# Altium PCB 400250.PcbDoc (part 1 of 2)
Units mm, origin at the board's own origin, x right, y up, seen from the top; angles counter-clockwise.
Board outline 46.04 x 15.24 mm, 2 copper layers (Top Layer, Bottom Layer), stack 1.97 mm thick; 97 components, 64 nets, 288 pads, 105 vias.
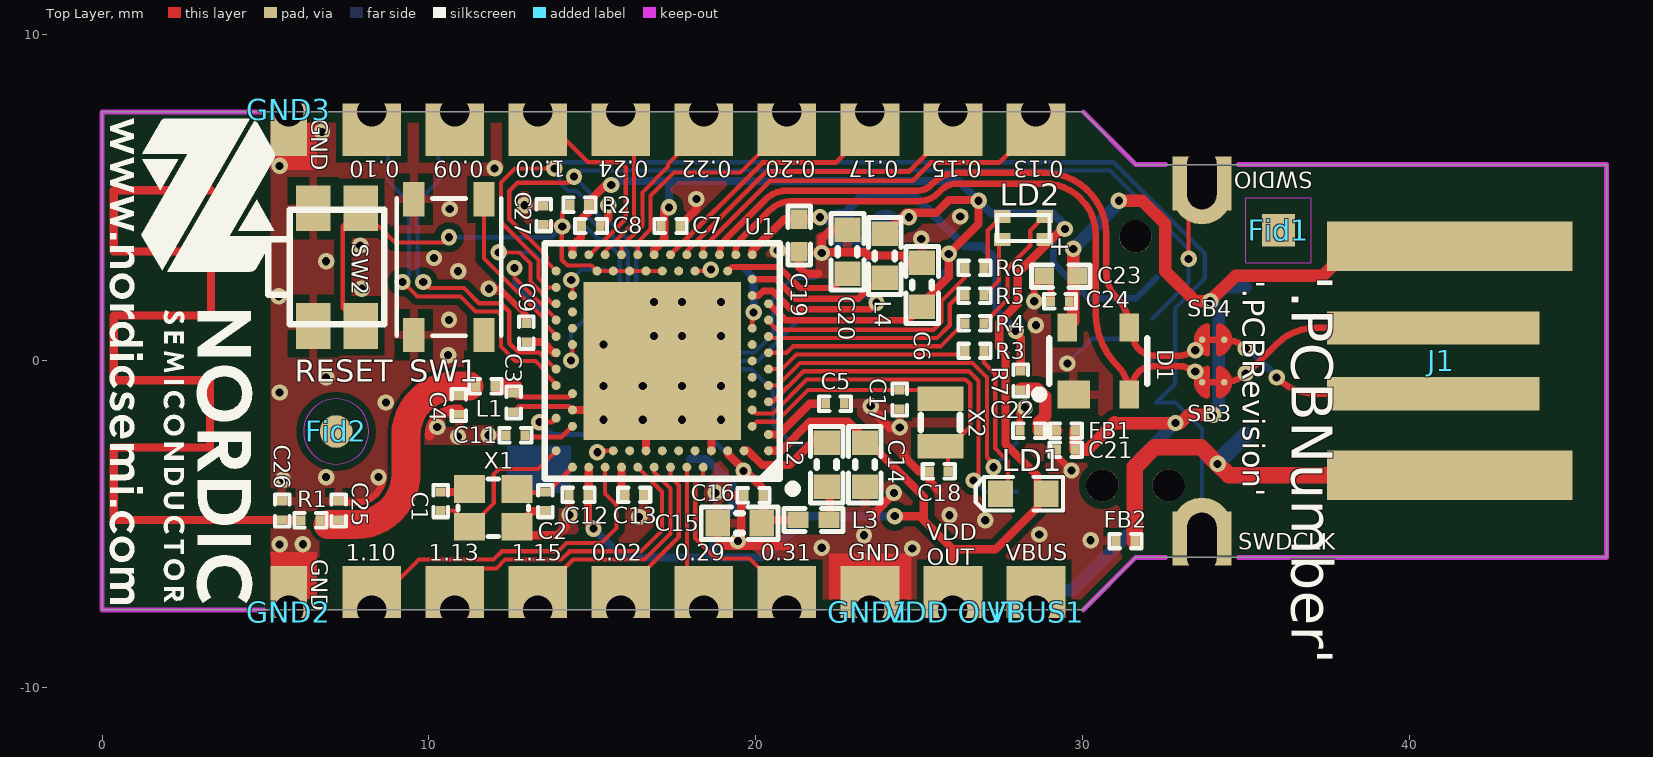
[diagram p0: Top Layer view]
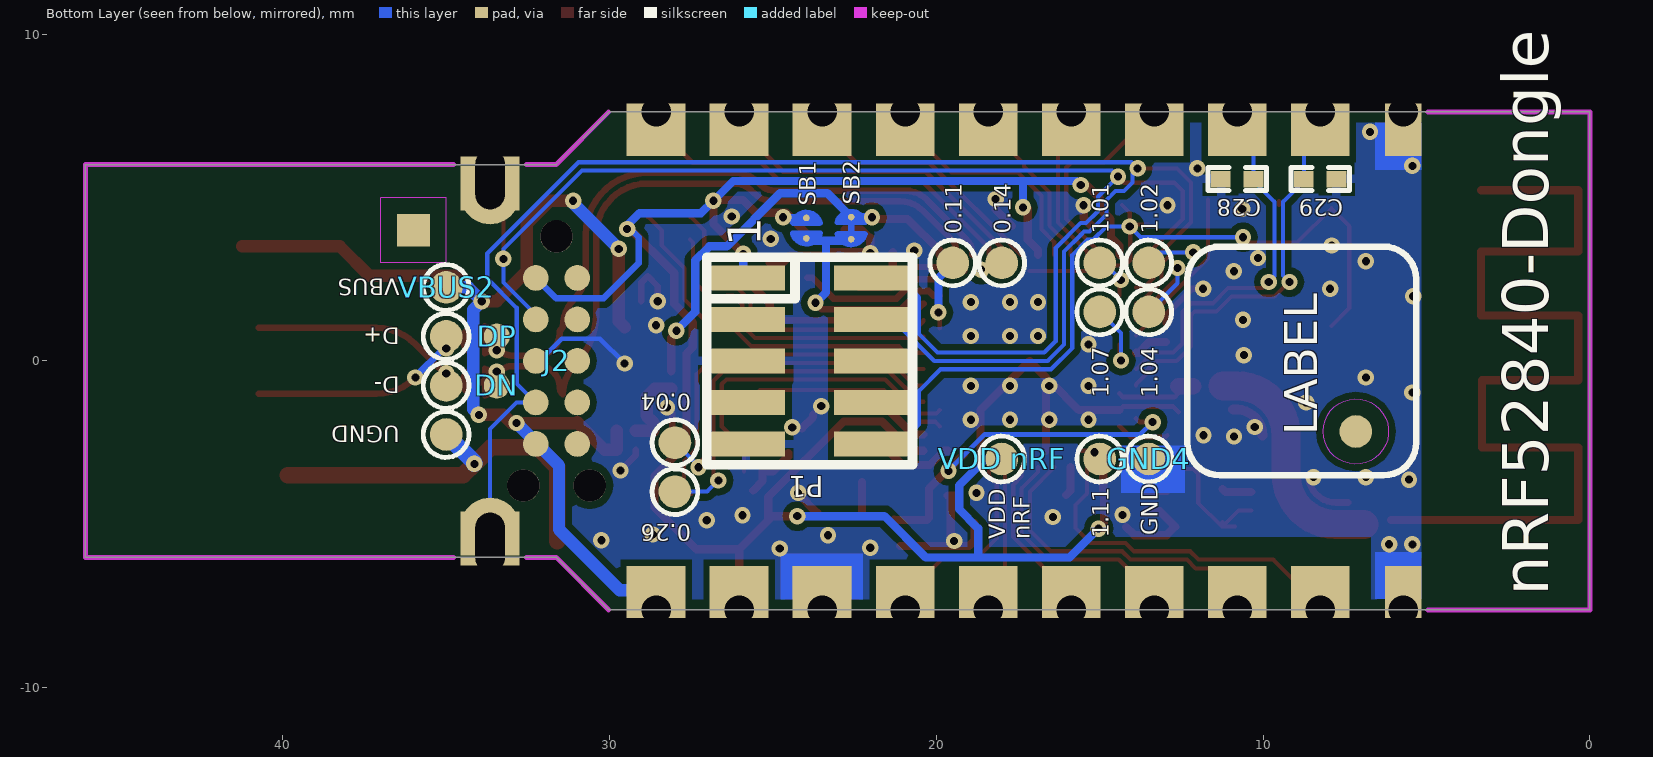
[diagram p1: Bottom Layer view, seen from below]

## Layer stack, top to bottom
Top Solder: solder mask 0.05, Solder Resist Halogen-Free, Dk 3.5
Top Layer: signal copper 0.035
Dielectric1: core 1.9, FR-4 Halogen-Free, Dk 4.8
Bottom Layer: signal copper 0.035
Bottom Solder: solder mask 0.05, Solder Resist Halogen-Free, Dk 3.5

## Board outline
0,-7.62 0,7.62 30.027,7.62 31.637,6.01 46.039,6.01 46.039,-6.01 31.637,-6.01 30.027,-7.62

## Design rules (kind name [scope] priority, off if disabled: settings)
Clearance ANT_Clerance [InNet('ANT') or InNet('RF')] p1: gap=0.127 ignorepadtopadclearanceinfootprint=FALSE except(0: Arc-Hole Track-Hole SMDPad-Hole THPad-Hole Via-Hole Fill-Hole Poly-Hole Region-Hole Text-Hole)
Clearance NPTH [Not PadIsPlated And HoleSize > 0] p2: gap=0.229 ignorepadtopadclearanceinfootprint=FALSE except(0: Arc-Hole Track-Hole SMDPad-Hole THPad-Hole Via-Hole Fill-Hole Poly-Hole Region-Hole Text-Hole)
Clearance Polygon_Clearance [(InNamedPolygon('Top_Layer-GND')) or (InNamedPolygon('Bottom_Layer-GND')) or (InNamedPolygon('Mid_Layer_1-GND')) or (InNamedPolygon('Mid_Layer_2-GND'))] p3: gap=0.203 ignorepadtopadclearanceinfootprint=FALSE
Clearance SB_Clearance [HasFootprint('Solderbridge')] p4: gap=0.127 ignorepadtopadclearanceinfootprint=FALSE except(0: Arc-Hole Track-Hole SMDPad-Hole THPad-Hole Via-Hole Fill-Hole Poly-Hole Region-Hole Text-Hole)
Clearance [All] p5: gap=0.127 ignorepadtopadclearanceinfootprint=FALSE
ComponentClearance [All] p1 off: gap=0.254 collisioncheckmode=3 verticalgap=0.254 showdistances=FALSE
DiffPairsRouting [All] p1: maxlimit=0.127 minlimit=0.127 mostfreqgap=0.127 toplayer_minwidth=0.2 toplayer_maxwidth=0.2 toplayer_prefwidth=0.2 bottomlayer_minwidth=0.2 bottomlayer_maxwidth=0.2 bottomlayer_prefwidth=0.2 maxuncoupledlength=12.7
FabricationTestPointUsage TestPointUsage [All] p1: valid=0 allowmultiple=FALSE
FabricationTestpoint Testpoint [All] p1: side=3 testpointundercomponent=TRUE minsize=1.016 maxsize=2.54 preferedsize=1.524 minholesize=0 maxholesize=1.016 preferedholesize=0.813 testpointgrid=0.025 allowsidetop=TRUE allowsidebottom=TRUE usegrid=TRUE gridtolerance=0
Height [All] p1 off: minheight=0 maxheight=25.4 prefheight=12.7
HoleSize [All] p1: absolutevalues=TRUE maxlimit=2.54 minlimit=0.1 maxpercent=80.000 minpercent=20.000
MinimumAnnularRing [All] p1 off: minimumring=0.152
PolygonConnect PolygonConnect_1 [isVia and innet(gnd)] p1: connectstyle=Direct reliefconductorwidth=0.254 reliefentries=4 polygonreliefangle="90 Angle" airgapwidth=0.254
PolygonConnect [All] p2: connectstyle=Relief reliefconductorwidth=0.254 reliefentries=4 polygonreliefangle="90 Angle" airgapwidth=0.254
RoutingVias [All] p1: holewidth=0.25 width=0.5 viastyle="Through Hole" minholewidth=0.1 minwidth=0.3 maxholewidth=0.305 maxwidth=0.61
SilkToSolderMaskClearance SilkscreenOverComponentPads [IsPad] p1: minsilkscreentomaskgap=0.254 clearancetoexposedcopper=TRUE
SolderMaskExpansion [All] p1: expansion=0.076 istentingtop=FALSE
Width [All] p1: maxlimit=2.54 minlimit=0.127 preferedwidth=0.152 minimp=50.000000 maximp=50.000000 favimp=50.000000
23 further rules are at their usual default settings.

## Classes and differential pairs
differential pair D: +D_P -D_N

## Components (designator, comment, footprint, x,y, rotation, side; value= is the part's Value field where it differs from the comment)
0.02 "CH" Castellated_Hole_0.9mm 15.875,-7.62 r0 top locked
0.04 "Ø1.0mm,SMD" TP_SMD_D1.0mm#1 28,-2.5 r180 bottom locked
0.09 "CH" Castellated_Hole_0.9mm 10.795,7.62 r180 top locked
0.10 "CH" Castellated_Hole_0.9mm 8.255,7.62 r180 top locked
0.11 "Ø1.0mm,SMD" TP_SMD_D1.0mm#1 19.5,3 r180 bottom locked
0.13 "CH" Castellated_Hole_0.9mm 28.575,7.62 r180 top locked
0.14 "Ø1.0mm,SMD" TP_SMD_D1.0mm#1 18,3 r180 bottom locked
0.15 "CH" Castellated_Hole_0.9mm 26.035,7.62 r180 top locked
0.17 "CH" Castellated_Hole_0.9mm 23.495,7.62 r180 top locked
0.20 "CH" Castellated_Hole_0.9mm 20.955,7.62 r180 top locked
0.22 "CH" Castellated_Hole_0.9mm 18.415,7.62 r180 top locked
0.24 "CH" Castellated_Hole_0.9mm 15.875,7.62 r180 top locked
0.26 "Ø1.0mm,SMD" TP_SMD_D1.0mm#1 28,-4 r180 bottom locked
0.29 "CH" Castellated_Hole_0.9mm 18.415,-7.62 r0 top locked
0.31 "CH" Castellated_Hole_0.9mm 20.955,-7.62 r0 top locked
1.00 "CH" Castellated_Hole_0.9mm 13.335,7.62 r180 top locked
1.01 "Ø1.0mm,SMD" TP_SMD_D1.0mm#1 15,3 r180 bottom locked
1.02 "Ø1.0mm,SMD" TP_SMD_D1.0mm#1 13.5,3 r180 bottom locked
1.04 "Ø1.0mm,SMD" TP_SMD_D1.0mm#1 13.5,1.5 r180 bottom locked
1.07 "Ø1.0mm,SMD" TP_SMD_D1.0mm#1 15,1.5 r180 bottom locked
1.10 "CH" Castellated_Hole_0.9mm 8.255,-7.62 r0 top locked
1.11 "Ø1.0mm,SMD" TP_SMD_D1.0mm#1 15,-3 r180 bottom locked
1.13 "CH" Castellated_Hole_0.9mm 10.795,-7.62 r0 top locked
1.15 "CH" Castellated_Hole_0.9mm 13.335,-7.62 r0 top locked
C1 "12pF" CAPC0603X03L_C 10.367,-4.293 r90 top
C2 "12pF" CAPC0603X03L_C 13.568,-4.293 r270 top
C3 "0.8pF" CAPC0603X03L_C 12.593,-1.275 r90 top locked
C4 "0.5pF" CAPC0603X03L_C 10.922,-1.346 r90 top locked
C5 "100nF" CAPC0603X03L_C 22.428,-1.306 r0 top locked
C6 "4.7µF" CAPC1608X06L 25.095,2.326 r90 top locked
C7 "100nF" CAPC0603X03L_C 17.399,4.129 r0 top locked
C8 "100nF" CAPC0603X03L_C 14.961,4.129 r0 top locked
C9 "820pF" CAPC0603X03L_C 12.979,0.864 r90 top locked
C11 "100pF" CAPC0603X03L_C 12.65,-2.275 r180 top
C12 "100nF" CAPC0603X03L_C 14.584,-4.101 r180 top locked
C13 "N.C." CAPC0603X03L_C_NC 16.285,-4.101 r0 top locked
C14 "1.0µF" CAPC1608X06L 23.343,-3.175 r270 top locked
C15 "1.0µF" CAPC1608X06L 19.511,-4.965 r0 top locked
C16 "47nF" CAPC0603X03L_C 19.939,-4.115 r180 top locked
C17 "12pF" CAPC0603X03L_C 24.409,-1.179 r270 top locked
C18 "12pF" CAPC0603X03L_C 25.603,-3.378 r180 top locked
C19 "4.7µF" CAPC1005X04L 21.336,3.835 r270 top locked
C20 "4.7µF" CAPC1608X06L 22.809,3.342 r90 top locked
C21 "10nF" CAPC0603X03L_C 29.489,-2.718 r0 top locked
C22 "100nF" CAPC0603X03L_C 28.372,-2.134 r0 top locked
C23 "4.7µF" CAPC1005X04L 29.337,2.591 r0 top locked
C24 "100nF" CAPC0603X03L_C 29.312,1.829 r0 top locked
C25 "N.C." CAPC0603X03L_C_NC 7.239,-4.572 r90 top locked
C26 "1.5pF" CAPC0603X03L_C 5.512,-4.572 r270 top locked
C27 "100nF" CAPC0603X03L_C 13.513,4.458 r270 top locked
C28 "N.C." CAPC1005X04L_NC 10.795,5.563 r180 bottom locked
C29 "N.C." CAPC1005X04L_NC 8.255,5.563 r180 bottom locked
D1 "PRTR5V0U2X" SOT190P230X110-4L 30.48,0 r90 top locked
D+ "Ø1.0mm,SMD" TP_SMD_D1.0mm#1 35,0.75 r180 bottom locked
D- "Ø1.0mm,SMD" TP_SMD_D1.0mm#1 35,-0.75 r180 bottom locked
DN "Ø1.0mm,SMD" TP_SMD_D1.0mm#2 33.45,-0.75 r270 bottom locked
DP "Ø1.0mm,SMD" TP_SMD_D1.0mm#2 33.45,0.75 r270 bottom locked
FB1 "120R/0.85A" INDC0603X03L_C 29.489,-2.134 r180 top locked
FB2 "120R/0.85A" INDC0603X03L_C 31.318,-5.512 r180 top locked
Fid1 "Fiducial mark" Fiducial_Square 36,4 r0 top locked value=N.A.
Fid2 "Fiducial mark" Fiducial 7.163,-2.159 r0 top locked value=N.A.
GND1 "GND" Castellated_Hole_0.9mm 23.495,-7.62 r0 top locked
GND2 "GND" Castellated_Hole_0.9mm_S 5.715,-7.62 r0 top locked
GND3 "GND" Castellated_Hole_0.9mm_S 5.715,7.62 r180 top locked
GND4 "GND" TP_SMD_D1.0mm#1 13.5,-3 r180 bottom locked
J1 "USB-A" USB-A-PCB 41.039,0.01 r180 top locked
J2 "TC2050-IDC" TC2050-IDC-NLFP 31.623,0 r270 bottom locked
L1 "4.7nH" INDC0603X03L_C 11.739,-0.771 r180 top locked
L2 "10µH" INDC1608X06L 22.174,-3.175 r90 top locked
L3 "15nH" INDC1005X04L 21.768,-4.862 r0 top locked
L4 "10µH" INDC1608X06L 23.952,3.215 r270 top locked
LD1 "L0603G" LED_0603_G 28.194,-4.064 r0 top locked
LD2 "LED RGB" LED_RGB_0603 28.194,4.064 r90 top locked
P1 "Pin Header 2x5, 1.27mm" HDR_2x5-SMD-1.27mm-NC 23.876,0 r270 bottom locked
R1 "0R" RESC0603X03L_C 6.375,-4.877 r180 top locked
R2 "10k" RESC0603X03L_C 14.605,4.775 r0 top locked
R3 "220R" RESC0603X03L_C 26.695,0.305 r0 top locked
R4 "1k2" RESC0603X03L_C 26.695,1.151 r0 top locked
R5 "2k2" RESC0603X03L_C 26.695,1.998 r0 top locked
R6 "390R" RESC0603X03L_C 26.695,2.845 r0 top locked
R7 "4R7" RESC0603X03L_C 28.114,-0.6 r270 top
SB1 "Solderbridge" Solderbridge 23.978,4.064 r270 bottom locked
SB2 "Solderbridge" Solderbridge_Shorted 22.606,4.064 r90 bottom locked net-tie
SB3 "Solderbridge" Solderbridge_Shorted 34,-0.65 r0 top locked net-tie
SB4 "Solderbridge" Solderbridge_Shorted 34,0.65 r0 top locked net-tie
SW1 "PB SW" C&K_PTS810 10.617,2.87 r270 top locked
SW2 "PTS840 GK SMTR LFS" EVQP7A_J_B_K 7.188,2.87 r270 top locked
SWDCLK "CH" Castellated_Hole_0.9mm_D 33.655,-5.56 r0 top locked
SWDIO "CH" Castellated_Hole_0.9mm_D 33.655,5.56 r180 top locked
U1 "nRF52840-QIAA" AQFN50P700X700X85_HS-74N 17.145,0 r180 top locked
UGND "Ø1.0mm,SMD" TP_SMD_D1.0mm#1 35,-2.25 r180 bottom locked
VBUS1 "VBUS" Castellated_Hole_0.9mm 28.575,-7.62 r0 top locked
VBUS2 "VBUS" TP_SMD_D1.0mm#1 35,2.25 r180 bottom locked
"VDD nRF" "Ø1.0mm,SMD" TP_SMD_D1.0mm#1 18,-3 r180 bottom locked
"VDD OUT" "CH" Castellated_Hole_0.9mm 26.035,-7.62 r0 top locked
X1 "32MHz" BT-XTAL_2016 11.967,-4.496 r0 top
X2 "32.768kHz" XTAL_2012 25.654,-1.88 r270 top locked

## Footprints (in the part's own frame and the unit in brackets; to place one, negate y for a bottom-side part, rotate by r counter-clockwise, add the part's x,y. Pads: shape width x height; smd on the part's side, far side on the other; paste and mask are expansions set on the pad)
AQFN50P700X700X85_HS-74N [mm] "AQFN, 73-Leads, Body 7.00x7.00mm, Pitch 0.50mm, Thermal Pad 4.95x4.95mm, IPC Medium Density"
  rect 4.83x4.83 smd mask+0.05: 74(0,0)
  round 0.275 smd paste+0.012 mask+0.05: A8(-1.25,3.25) A10(-0.75,3.25) A12(-0.25,3.25) A14(0.25,3.25) A16(0.75,3.25) A18(1.25,3.25) A20(1.75,3.25) A22(2.25,3.25) A23(2.75,3.25) AA24(3.25,-2.25) AB2(-2.75,-2.5) AC5(-2,-2.75) AC9(-1,-2.75) AC11(-0.5,-2.75) AC13(0,-2.75) AC15(0.5,-2.75) AC17(1,-2.75) AC19(1.5,-2.75) AC21(2,-2.75) AC24(3.25,-2.75) AD2(-2.75,-3.25) AD4(-2.25,-3.25) AD6(-1.75,-3.25) AD8(-1.25,-3.25) AD10(-0.75,-3.25) AD12(-0.25,-3.25) AD14(0.25,-3.25) AD16(0.75,-3.25) AD18(1.25,-3.25) AD20(1.75,-3.25) AD22(2.25,-3.25) AD23(2.75,-3.25) B1(-3.25,2.75) B3(-2.5,2.75) B5(-2,2.75) B7(-1.5,2.75) B9(-1,2.75) B11(-0.5,2.75) B13(0,2.75) B15(0.5,2.75) B17(1,2.75) B19(1.5,2.75) B24(3.25,2.75) C1(-3.25,2.25) D2(-2.75,2) D23(2.75,2) E24(3.25,1.75) F2(-2.75,1.5) F23(2.75,1.5) G1(-3.25,1.25) H2(-2.75,1) H23(2.75,1) J1(-3.25,0.75) J24(3.25,0.75) K2(-2.75,0.5) L1(-3.25,0.25) L24(3.25,0.25) M2(-2.75,0) N1(-3.25,-0.25) N24(3.25,-0.25) P2(-2.75,-0.5) P23(2.75,-0.5) R1(-3.25,-0.75) R24(3.25,-0.75) T2(-2.75,-1) T23(2.75,-1) U1(-3.25,-1.25) U24(3.25,-1.25) V23(2.75,-1.5) W1(-3.25,-1.75) W24(3.25,-1.75) Y2(-2.75,-2) Y23(2.75,-2)
  silkscreen extent -4.11,-3.6 3.6,4.04, body extent -3.55,-3.55 3.55,3.55, height 0.85
BT-XTAL_2016 [mm] "Crystal 2.0 x 1.6 mm"
  rect 0.95x0.85 smd: 1(-0.725,-0.575) 2(0.725,-0.575) 3(0.725,0.575) 4(-0.725,0.575)
  silkscreen extent -1.08,-0.88 1.08,0.88, body extent -1.05,-0.85 1.05,0.85, height 0.56
C&K_PTS810 [mm] "Microminiature SMT Top Actuated"
  rect 1.05x0.65 smd: 0(2.075,1.075) 1(-2.075,1.075) 2(-2.075,-1.075) 2(2.075,-1.075)
  silkscreen extent -2.1,-1.6 2.1,1.6, body extent -2.29,-1.6 2.29,1.6, height 2.5
CAPC0603X03L_C [mm] "Chip Capacitor, 2-Leads, Body 0.6x0.3mm, IPC High Density"
  rect 0.27x0.3 smd: 1(-0.285,0) 2(0.285,0)
  silkscreen extent -0.49,-0.22 0.49,0.22, body extent -0.3,-0.15 0.31,0.15, height 0.3
CAPC0603X03L_C_NC [mm] "Chip Capacitor, 2-Leads, Body 0.6x0.3mm, IPC High Density"
  rect 0.27x0.3 smd mask+0.05: 1(-0.285,0) 2(0.285,0)
  silkscreen extent -0.49,-0.22 0.49,0.22
CAPC1005X04L [mm] "Chip Capacitor, 2-Leads, Body 1.0x0.5mm, IPC High Density"
  rect 0.6x0.5 smd: 1(-0.5,0) 2(0.5,0)
  silkscreen extent -0.9,-0.35 0.9,0.35, body extent -0.51,-0.25 0.51,0.25, height 0.5
CAPC1005X04L_NC [mm] "Chip Capacitor, 2-Leads, Body 1.0x0.5mm, IPC High Density"
  rect 0.6x0.5 smd: 1(-0.5,0) 2(0.5,0)
  silkscreen extent -0.9,-0.35 0.9,0.35
CAPC1608X06L [mm] "Chip Capacitor, 2-Leads, Body 1.6x0.8mm, IPC High Density"
  rect 0.75x0.8 smd: 1(-0.675,0) 2(0.675,0)
  silkscreen extent -1.17,-0.5 1.17,0.5, body extent -0.8,-0.43 0.8,0.43, height 0.8
Castellated_Hole_0.9mm [mm]
  rect 1.8x0.25 hole 0.25 square: 1(0,-0.126)
  rect 1.8x1.35 hole 0.9 copper offset 0,0.675: 1(0,0)
Castellated_Hole_0.9mm_D [mm]
  rect 1.8x0.25 hole 0.25 square: 1(0,-0.576)
  rect 1.8x1.35 hole 0.9 slot 1.83 at 90 deg copper offset 0,0.275: 1(0,0)
  round 1.8 smd paste-5: 1(0,0.48)
  round 1.8 smd far side paste-5: 1(0,0.48)
Castellated_Hole_0.9mm_S [mm]
  rect 1.118x0.25 hole 0.25 square: 1(0,-0.126)
  rect 1.118x1.35 hole 0.9 copper offset 0,0.675: 1(0,0)
EVQP7A_J_B_K [mm] "Subminiature Side Actuated Tact Switch for SMT"
  rect 1.4x1.05 smd: 1(-1.8,0.725) 1(1.8,0.725) 2(-1.8,-0.725) 2(1.8,-0.725)
  silkscreen extent -1.75,-2.1 1.75,1.45, body extent -2.35,-2.1 2.35,1.45, height 1.35
Fiducial [mm] "Fiducial Mark"
  round 1 smd paste+0 mask+0.5: 0(0,0)
  round 1 smd far side paste+0 mask+0.5: 0(0,0)
  Top Layer keep-out circle w0.01: c0,0 r1
  Bottom Layer keep-out circle w0.01: c0,0 r1
Fiducial_Square [mm] "Fiducial Mark"
  rect 1x1 smd paste-10 mask+0.5: 0(0,0)
  rect 1x1 smd far side paste-10 mask+0.5: 0(0,0)
  Top Layer keep-out lines w0.01: -1,-1 1,-1 1,1 -1,1 -1,-1
  Bottom Layer keep-out lines w0.01: -1,-1 -1,1 1,1 1,-1 -1,-1
HDR_2x5-SMD-1.27mm-NC [mm] "SMT MICRO HEADER, (1,27) .050\""
  rect 0.76x2.4 smd: 1(-2.54,-1.95) 2(-2.54,1.95) 3(-1.27,-1.95) 4(-1.27,1.95) 5(0,-1.95) 6(0,1.95) 7(1.27,-1.95) 8(1.27,1.95) 9(2.54,-1.95) 10(2.54,1.95)
  silkscreen extent -3.18,-3.15 3.18,3.15
INDC0603X03L_C [mm] "Chip Inductor, 2-Leads, Body 0.6x0.3mm, IPC High Density"
  rect 0.27x0.3 smd: 1(-0.285,0) 2(0.285,0)
  silkscreen extent -0.49,-0.22 0.49,0.22, body extent -0.31,-0.16 0.31,0.16, height 0.26
INDC1005X04L [mm] "Chip Inductor, 2-Leads, Body 1.0x0.5mm, IPC High Density"
  rect 0.65x0.5 smd: 1(-0.475,0) 2(0.475,0)
  silkscreen extent -0.9,-0.35 0.9,0.35, body extent -0.5,-0.3 0.5,0.3, height 0.5
INDC1608X06L [mm] "Chip Inductor, 2-Leads, Body 1.6x0.8mm, IPC High Density"
  rect 0.75x0.8 smd: 1(-0.675,0) 2(0.675,0)
  silkscreen extent -1.17,-0.5 1.17,0.5, body extent -0.8,-0.48 0.8,0.48, height 0.8
LED_0603_G [mil] "SMD Super Bright LED, GREEN"
  rect 30x32 smd: 1(-27.5,0) 2(27.5,0)
  silkscreen extent -58,-20 48,20, body extent -32,-16 32,16, height 24
LED_RGB_0603 [mm]
  rect 0.4x0.5 smd paste+0: 1(0.35,-0.65) 2(-0.35,0.65) 3(0.35,0.65) 4(-0.35,-0.65)
  silkscreen extent -0.4,-0.8 0.4,0.8, body extent -0.4,-0.8 0.4,0.8, height 0.5
RESC0603X03L_C [mm] "Chip Resistor, 2-Leads, Body 0.6x0.3mm, IPC High Density"
  rect 0.27x0.3 smd: 1(-0.285,0) 2(0.285,0)
  silkscreen extent -0.49,-0.22 0.49,0.22, body extent -0.3,-0.15 0.3,0.15, height 0.23
Solderbridge [mm]
  round 0.2 smd paste-10: 1(-0.312,0) 2(0.312,0)
  Top Layer region: -0.077,-0.432 -0.152,-0.505 -0.271,-0.467 -0.335,-0.424 -0.409,-0.351 -0.462,-0.292 -0.521,-0.193 -0.549,-0.099 -0.544,0.122 -0.518,0.193 -0.434,0.33 -0.351,0.411 -0.259,0.469 -0.157,0.5 -0.107,0.483 -0.077,0.43
  Top Layer region: 0.077,0.432 0.152,0.505 0.271,0.467 0.335,0.424 0.409,0.351 0.462,0.292 0.521,0.193 0.549,0.099 0.544,-0.122 0.518,-0.193 0.434,-0.33 0.351,-0.411 0.259,-0.469 0.157,-0.5 0.107,-0.483 0.077,-0.43
  Top Layer lines w0.152: 0.153,0.431 cw(c0.042,0) 0.383,0.286 cw(c0.042,0) 0.478,-0.088 cw(c0.042,0) 0.153,-0.431 ; -0.153,0.431 ccw(c-0.042,0) -0.312,-0.353 ccw(c-0.042,0) -0.153,-0.431
Solderbridge_Shorted [mm]
  round 0.2 smd paste-10: 1(-0.338,0) 2(0.338,0)
  Top Layer region: -0.102,-0.432 -0.178,-0.505 -0.296,-0.467 -0.361,-0.424 -0.434,-0.351 -0.488,-0.292 -0.546,-0.193 -0.574,-0.099 -0.569,0.122 -0.544,0.193 -0.46,0.33 -0.376,0.411 -0.284,0.469 -0.183,0.5 -0.132,0.483 -0.102,0.43
  Top Layer region: 0.102,0.432 0.178,0.505 0.296,0.467 0.361,0.424 0.434,0.351 0.488,0.292 0.546,0.193 0.574,0.099 0.569,-0.122 0.544,-0.193 0.46,-0.33 0.376,-0.411 0.284,-0.469 0.183,-0.5 0.132,-0.483 0.102,-0.43
  Top Layer lines w0.152: -0.178,-0.431 cw(c-0.068,0) -0.178,0.431 ; 0.178,-0.431 ccw(c0.068,0) 0.178,0.431
  Top Layer lines w0.203: -0.338,0 0.338,0
SOT190P230X110-4L [mm] "SOT143, 4-Leads, Body 3.0x2.5mm (max), Pitch 1.90mm, IPC High Density"
  rect 0.85x1 smd: 1(-1.025,0.75)
  rect 0.85x0.6 smd: 2(-1.025,-0.95) 3(1.025,-0.95) 4(1.025,0.95)
  silkscreen extent -1.15,-1.5 0.7,1.92, body extent -1.21,-1.46 1.21,1.46, height 1
TC2050-IDC-NLFP [mil]
  round 39 hole 39 unplated mask+3: 0(-150,0) 0(150,-40) 0(150,40)
  round 31 smd paste-196.85: 1(-100,-25) 2(-50,-25) 3(0,-25) 4(50,-25) 5(100,-25) 6(100,25) 7(50,25) 8(0,25) 9(-50,25) 10(-100,25)
  Top Layer pour cut-out: -100,25 -100,-25 100,-25 100,25
TP_SMD_D1.0mm#1 [mm] "Test point - pad 1.0mm"
  round 1 smd paste-5: 1(0,0)
  silkscreen extent -0.7,-0.7 0.7,0.7
TP_SMD_D1.0mm#2 [mm] "Test point - pad 1.0mm"
  round 0.8 smd paste-5: 1(0,0)
USB-A-PCB [mil]
  rect 296x60 smd paste-196.85: 1(-7.87,-137.8) 4(-7.87,138)
  rect 256x40 smd paste-196.85: 2(12,-39.37) 3(12,40)
XTAL_2012 [mm] "XTAL SMD 2.0 x 1.2 mm"
  rect 0.75x1.4 smd: 1(-0.725,0) 2(0.725,0)
  silkscreen extent -0.24,-0.6 0.24,0.6, body extent -1,-0.61 1,0.61, height 0.6

## Part data
0.02 0.09 0.10 0.13 0.15 0.17 0.20 0.22 0.24 0.29 0.31 1.00 1.10 1.13 1.15 GND1 VBUS1 "VDD OUT": library part "Castellated Hole 0.9mm", "Castellated Hole 0.9mm", Manufacturer=N.A., Artikkelnr Noca=N.A., Author=rsk, Component Class=Connectors, ComponentLink1Description=Datasheet, ComponentLink1URL=N.A., ComponentLink2Description="Supplier link", ComponentLink2URL=N.A., Footprint Doc=N.A., HelpURL=N.A., LatestRevisionDate=2016-08-22, Manufacturer Part Number=N.A., Note=N.A., Pad Count=1, Part Number="Castellated Hole 0.9mm", Part number IPS=N.A., Part number Norautron=N.A., PartId=100500565, Published=2016-08-22, Supplier 1=N.A., Supplier 2=N.A., Supplier Part Number 1=N.A., Supplier Part Number 2=N.A.
0.04 0.11 0.14 0.26 1.01 1.02 1.04 1.07 1.11 D+ D- DN DP GND4 UGND VBUS2 "VDD nRF": library part TP_SMD_Ø1.0MM, "1.0mm circular SMD testpad", Manufacturer="Nordic Semiconductor", Manufacturer Part Number=N.A., Artikkelnr Noca=N.A., Author=rsk, Component Class=Connectors, ComponentLink1Description=Datasheet, ComponentLink1URL=N.A., ComponentLink2Description="Supplier link", ComponentLink2URL=N.A., Footprint Doc=TP_SMD_Ø1.0mm, HelpURL=N.A., LatestRevisionDate=2021-03-05, Note=N.A., Pad Count=1, Part Number=TP_SMD_Ø1.0MM, Part number IPS=N.A., Part number Norautron=N.A., PartId=100500475, Published=2013-06-11, Supplier 1=N.A., Supplier 2=N.A., Supplier Part Number 1=N.A., Supplier Part Number 2=N.A.
C1 C2 C17 C18: library part C0201-12p, "Capacitor, NP0, ±2%", Manufacturer=N.A., Part number IPS=00000007848, Artikkelnr Noca=N.A., Author=rsk, Component Class=Capacitors, ComponentLink1Description=Datasheet, ComponentLink1URL=N.A., ComponentLink2Description="Supplier link", ComponentLink2URL=N.A., Footprint Doc=0201, HelpURL=N.A., LatestRevisionDate=2017-11-09, Manufacturer Part Number=N.A., Note=25V, Pad Count=2, Part Number=C0201-12p, Part number Norautron=N.A., PartId=100200033, Published=2014-11-13, Supplier 1=N.A., Supplier 2=N.A., Supplier Part Number 1=N.A., Supplier Part Number 2=N.A.
C3: library part C0201-0.8p, "Capacitor, NP0, ±0.05pF, 50V", Manufacturer=Murata, Manufacturer Part Number=GJM0335C1HR80WB01, Part number IPS=80000001975, Part number Norautron=N.A., Artikkelnr Noca=N.A., Author=rsk, Component Class=Capacitors, ComponentLink1Description=Datasheet, ComponentLink1URL=N.A., ComponentLink2Description="Supplier link", ComponentLink2URL=N.A., Footprint Doc=0201, HelpURL=N.A., LatestRevisionDate=2018-10-22, Note=50V, Pad Count=2, Part Number=C0201-0.8p, PartId=100200012, Published=2014-11-13, Supplier 1=N.A., Supplier 2=N.A., Supplier Part Number 1=N.A., Supplier Part Number 2=N.A.
C4: library part C0201-0.5p, "Capacitor, NP0, ±0.05pF", Manufacturer=N.A., Artikkelnr Noca=N.A., Author=rsk, Component Class=Capacitors, ComponentLink1Description=Datasheet, ComponentLink1URL=N.A., ComponentLink2Description="Supplier link", ComponentLink2URL=N.A., Footprint Doc=0201, HelpURL=N.A., LatestRevisionDate=2018-10-22, Manufacturer Part Number=N.A., Note=50V, Pad Count=2, Part Number=C0201-0.5p, Part number IPS=N.A., Part number Norautron=N.A., PartId=100200008, Published=2014-11-13, Supplier 1=N.A., Supplier 2=N.A., Supplier Part Number 1=N.A., Supplier Part Number 2=N.A.
C5 C7 C8 C12 C22 C24 C27: library part C0201-100n, "Capacitor, X5R, ±10%", Manufacturer=N.A., Part number IPS="00000001248, 00000002505", Artikkelnr Noca=N.A., Author=rsk, Component Class=Capacitors, ComponentLink1Description=Datasheet, ComponentLink1URL=N.A., ComponentLink2Description="Supplier link", ComponentLink2URL=N.A., Footprint Doc=0201, HelpURL=N.A., LatestRevisionDate=2017-11-09, Manufacturer Part Number=N.A., Note=16V, Pad Count=2, Part Number=C0201-100n, Part number Norautron=N.A., PartId=100200078, Published=2014-11-13, Supplier 1=N.A., Supplier 2=N.A., Supplier Part Number 1=N.A., Supplier Part Number 2=N.A.
C6 C20: library part C0603-4µ7, "Capacitor, X5R, ±10%", Manufacturer=N.A., Part number IPS=00000007783, Artikkelnr Noca=20069060, Author=rsk, Component Class=Capacitors, ComponentLink1Description=Datasheet, ComponentLink1URL=N.A., ComponentLink2Description="Supplier link", ComponentLink2URL=N.A., Footprint Doc=0603, HelpURL=N.A., LatestRevisionDate=2009-11-23, Manufacturer Part Number=N.A., Note=6.3V, Pad Count=2, Part Number=C0603-4µ7, Part number Norautron=N.A., PartId=100200274, Published=2009-05-08, Supplier 1=N.A., Supplier 2=N.A., Supplier Part Number 1=N.A., Supplier Part Number 2=N.A.
C9: library part C0201-820p, "Capacitor, X7R, ±10%", Manufacturer=N.A., Part number IPS=00000001249, Artikkelnr Noca=N.A., Author=rsk, Component Class=Capacitors, ComponentLink1Description=Datasheet, ComponentLink1URL=N.A., ComponentLink2Description="Supplier link", ComponentLink2URL=N.A., Footprint Doc=0201, HelpURL=N.A., LatestRevisionDate=2017-11-09, Manufacturer Part Number=N.A., Note=25V, Pad Count=2, Part Number=C0201-820p, Part number Norautron=N.A., PartId=100200055, Published=2014-11-13, Supplier 1=N.A., Supplier 2=N.A., Supplier Part Number 1=N.A., Supplier Part Number 2=N.A.
C11: library part C0201-100p, "Capacitor, NP0, ±2%, 25V", Manufacturer=Murata, Manufacturer Part Number=GRM0335C1E101GA01, Part number IPS=00000007853, Part number Norautron=N.A., Artikkelnr Noca=N.A., Author=rsk, Component Class=Capacitors, ComponentLink1Description=Datasheet, ComponentLink1URL=N.A., ComponentLink2Description="Supplier link", ComponentLink2URL=N.A., Footprint Doc=0201, HelpURL=N.A., LatestRevisionDate=2019-04-16, Note=25V, Pad Count=2, Part Number=C0201-100p, PartId=100200044, Published=2019-04-16, Supplier 1=N.A., Supplier 2=N.A., Supplier Part Number 1=N.A., Supplier Part Number 2=N.A.
C13 C25: library part C0201-N.C., "Not mounted", Manufacturer=N.A., Artikkelnr Noca=N.A., Assembly="Not mounted", Author=rsk, Component Class=Capacitors, ComponentLink1Description=Datasheet, ComponentLink1URL=N.A., ComponentLink2Description="Supplier link", ComponentLink2URL=N.A., Footprint Doc=0201, HelpURL=N.A., LatestRevisionDate=2014-11-13, Manufacturer Part Number=N.A., Note="Chip Cap", Pad Count=2, Part Number=C0201-N.C., Part number IPS=N.A., Part number Norautron=N.A., PartId=100200001, Published=2014-11-13, Supplier 1=N.A., Supplier 2=N.A., Supplier Part Number 1=N.A., Supplier Part Number 2=N.A.
C14 C15: library part C0603-1µ0, "Capacitor, X7R, ±10%", Manufacturer=N.A., Part number IPS=00000000616, Artikkelnr Noca=20039282, Author=rsk, Component Class=Capacitors, ComponentLink1Description=Datasheet, ComponentLink1URL=N.A., ComponentLink2Description="Supplier link", ComponentLink2URL=N.A., Footprint Doc=0603, HelpURL=N.A., LatestRevisionDate=2013-06-05, Manufacturer Part Number=N.A., Note=16V, Pad Count=2, Part Number=C0603-1µ0, Part number Norautron=N.A., PartId=100200271, Published=2009-05-08, Supplier 1=N.A., Supplier 2=N.A., Supplier Part Number 1=N.A., Supplier Part Number 2=N.A.
C16: library part C0201-47n, "Capacitor, X5R, ±10%", Manufacturer=N.A., Part number IPS=00000001250, Artikkelnr Noca=N.A., Author=rsk, Component Class=Capacitors, ComponentLink1Description=Datasheet, ComponentLink1URL=N.A., ComponentLink2Description="Supplier link", ComponentLink2URL=N.A., Footprint Doc=0201, HelpURL=N.A., LatestRevisionDate=2017-11-09, Manufacturer Part Number=N.A., Note=10V, Pad Count=2, Part Number=C0201-47n, Part number Norautron=N.A., PartId=100200074, Published=2014-11-13, Supplier 1=N.A., Supplier 2=N.A., Supplier Part Number 1=N.A., Supplier Part Number 2=N.A.
C19 C23: library part C0402-4µ7, "Capacitor, X5R, ±20%", Manufacturer=N.A., Part number IPS="00000001251, 00000007165", Supplier Part Number 1=490-13252-1-ND, Artikkelnr Noca=20039482, Author=rsk, Component Class=Capacitors, ComponentLink1Description=Datasheet, ComponentLink1URL=N.A., ComponentLink2Description="Supplier link", ComponentLink2URL=N.A., Footprint Doc=0402, HelpURL=N.A., LatestRevisionDate=2017-11-09, Manufacturer Part Number=N.A., Note=10V, Pad Count=2, Part Number=C0402-4µ7, Part number Norautron=N.A., PartId=100200193, Published=2009-05-08, Supplier 1=Digi-Key, Supplier 2=N.A., Supplier Part Number 2=N.A.
C21: library part C0201-10n, "Capacitor, X7R, ±10%", Manufacturer=N.A., Part number IPS=00000003480, Artikkelnr Noca=N.A., Author=rsk, Component Class=Capacitors, ComponentLink1Description=Datasheet, ComponentLink1URL=N.A., ComponentLink2Description="Supplier link", ComponentLink2URL=N.A., Footprint Doc=0201, HelpURL=N.A., LatestRevisionDate=2017-11-09, Manufacturer Part Number=N.A., Note=10V, Pad Count=2, Part Number=C0201-10n, Part number Norautron=N.A., PartId=100200067, Published=2014-11-13, Supplier 1=N.A., Supplier 2=N.A., Supplier Part Number 1=N.A., Supplier Part Number 2=N.A.
C26: library part C0201-1.5p, "Capacitor, NP0, ±0.1pF", Manufacturer=N.A., Part number IPS=00000007107, Artikkelnr Noca=N.A., Author=rsk, Component Class=Capacitors, ComponentLink1Description=Datasheet, ComponentLink1URL=N.A., ComponentLink2Description="Supplier link", ComponentLink2URL=N.A., Footprint Doc=0201, HelpURL=N.A., LatestRevisionDate=2017-11-09, Manufacturer Part Number=N.A., Note=50V, Pad Count=2, Part Number=C0201-1.5p, Part number Norautron=N.A., PartId=100200017, Published=2014-11-13, Supplier 1=N.A., Supplier 2=N.A., Supplier Part Number 1=N.A., Supplier Part Number 2=N.A.
C28 C29: library part C0402-N.C., "Not mounted", Manufacturer=N.A., Artikkelnr Noca=N.A., Assembly="Not mounted", Author=rsk, Component Class=Capacitors, ComponentLink1Description=Datasheet, ComponentLink1URL=N.A., ComponentLink2Description="Supplier link", ComponentLink2URL=N.A., Footprint Doc=0402, HelpURL=N.A., LatestRevisionDate=2009-05-08, Manufacturer Part Number=N.A., Note="Chip Cap", Pad Count=2, Part Number=C0402-N.C., Part number IPS=N.A., Part number Norautron=N.A., PartId=100200105, Published=2009-05-08, Supplier 1=N.A., Supplier 2=N.A., Supplier Part Number 1=N.A., Supplier Part Number 2=N.A.
D1: "Ultra low capacitance double rail-to-rail ESD protection diode", Manufacturer="NXP Semiconductors", Part number IPS=00000009951, Part number Norautron=N.A., Supplier Part Number 1=568-4140-1-ND, Artikkelnr Noca=10069015, Author=rsk, Component Class=Semiconductors, ComponentLink1Description=Datasheet, ComponentLink1URL=N.A., ComponentLink2Description="Supplier link", ComponentLink2URL=N.A., Footprint Doc=SOT-143B, HelpURL=http://www.farnell.com/datasheets/109718.pdf, LatestRevisionDate=2017-11-09, Manufacturer Part Number=PRTR5V0U2X, Note=N.A., Pad Count=4, Part Number=PRTR5V0U2X, PartId=101300082, Published=2012-06-11, Supplier 1=Digi-Key, Supplier 2=Farnell, Supplier Part Number 2=152-4157
FB1 FB2: library part FB0201-120R@100M-850mA, "Ferrite Bead, 120 Ohm @ 100MHz, 850mA, 150 mOhm Max", Manufacturer="Taiyo Yuden", Manufacturer Part Number=BKP0603HS121-T, Part number IPS=00000001252, Part number Norautron=N.A., Supplier Part Number 1=587-3286-1-ND, Artikkelnr Noca=N.A., Author=rsk, Component Class=Inductors, ComponentLink1Description=Datasheet, ComponentLink1URL=N.A., ComponentLink2Description="Supplier link", ComponentLink2URL=N.A., Footprint Doc=0201, HelpURL=http://ds.yuden.co.jp/TYCOMPAS/ut/detail.do?productNo=BKP0603HS121-T&fileName=BKP0603HS121-T_SS&mode=specSheetDownload, LatestRevisionDate=2019-01-29, Note="Chip EMIFIL Inductor Type Chip Ferrite Bead", Pad Count=2, Part Number=FB0201-120R@100M-850mA, PartId=100300097, Published=2016-08-23, Supplier 1=Digi-Key, Supplier 2=N.A., Supplier Part Number 2=N.A.
Fid1: library part Fid-Mark-Square, "Fiducial Mark", Manufacturer=N.A., Artikkelnr Noca=N.A., Author=rsk, Component Class=Connectors, ComponentLink1Description=Datasheet, ComponentLink1URL=N.A., ComponentLink2Description="Supplier link", ComponentLink2URL=N.A., Footprint Doc=Fiducial, HelpURL=N.A., LatestRevisionDate=2017-01-30, Manufacturer Part Number=N.A., Note=N.A., Pad Count=1, Part Number=Fid-Mark-Square, Part number IPS=N.A., Part number Norautron=N.A., PartId=100500074, Published=2009-12-12, Supplier 1=N.A., Supplier 2=N.A., Supplier Part Number 1=N.A., Supplier Part Number 2=N.A.
Fid2: library part Fid-Mark, "Fiducial Mark", Manufacturer=N.A., Artikkelnr Noca=N.A., Author=rsk, Component Class=Connectors, ComponentLink1Description=Datasheet, ComponentLink1URL=N.A., ComponentLink2Description="Supplier link", ComponentLink2URL=N.A., Footprint Doc=Fiducial, HelpURL=N.A., LatestRevisionDate=2009-12-12, Manufacturer Part Number=N.A., Note=N.A., Pad Count=1, Part Number=Fid-Mark, Part number IPS=N.A., Part number Norautron=N.A., PartId=100500073, Published=2009-12-12, Supplier 1=N.A., Supplier 2=N.A., Supplier Part Number 1=N.A., Supplier Part Number 2=N.A.
GND2 GND3: library part "Castellated Hole 0.9mm_S", "Castellated Hole 0.9mm", Manufacturer=N.A., Artikkelnr Noca=N.A., Author=rsk, Component Class=Connectors, ComponentLink1Description=Datasheet, ComponentLink1URL=N.A., ComponentLink2Description="Supplier link", ComponentLink2URL=N.A., Footprint Doc=N.A., HelpURL=N.A., LatestRevisionDate=2018-01-24, Manufacturer Part Number=N.A., Note=N.A., Pad Count=1, Part Number="Castellated Hole 0.9mm_S", Part number IPS=N.A., Part number Norautron=N.A., PartId=100500566, Published=2018-01-24, Supplier 1=N.A., Supplier 2=N.A., Supplier Part Number 1=N.A., Supplier Part Number 2=N.A.
J1: library part USB-A-PCB, "USB-A PCB footprint", Manufacturer=N.A., Artikkelnr Noca=N.A., Author=rsk, Component Class=Connectors, ComponentLink1Description=Datasheet, ComponentLink1URL=N.A., ComponentLink2Description="Supplier link", ComponentLink2URL=N.A., Footprint Doc=USB-A-PCB, HelpURL=N.A., LatestRevisionDate=2014-06-04, Manufacturer Part Number=N.A., Note=N.A., Pad Count=4, Part Number=USB-A-PCB, Part number IPS=N.A., Part number Norautron=N.A., PartId=100500219, Published=2014-06-04, Supplier 1=N.A., Supplier 2=N.A., Supplier Part Number 1=N.A., Supplier Part Number 2=N.A.
J2: library part TC2050-IDC-NLFP, "CBL PLUG-OF-NAILS 10-PIN", Manufacturer="Tag-Connect LLC", Part number IPS=N.A., Supplier Part Number 1=TC2050-IDC-NL-ND, Artikkelnr Noca=N.A., Author=rsk, Component Class=Connectors, ComponentLink1Description=Datasheet, ComponentLink1URL=N.A., ComponentLink2Description="Supplier link", ComponentLink2URL=N.A., Footprint Doc=TC2050-IDC-NLFP, HelpURL=http://www.tag-connect.com/Materials/TC2050-IDC%20Datasheet.pdf, LatestRevisionDate=2012-11-21, Manufacturer Part Number=TC2050-IDC-NLFP, Note=N.A., Pad Count=10, Part Number=TC2050-IDC-NLFP, Part number Norautron=N.A., PartId=100500463, Published=2012-11-21, Supplier 1=Digi-Key, Supplier 2=N.A., Supplier Part Number 2=N.A.
L1: library part L0201-4n7, "Inductor, 350mA, ±3%", Manufacturer=Murata, Manufacturer Part Number=LQP03TN4N7H02D, Part number IPS=00000001792, Part number Norautron=N.A., Artikkelnr Noca=N.A., Author=rsk, Component Class=Inductors, ComponentLink1Description=Datasheet, ComponentLink1URL=N.A., ComponentLink2Description="Supplier link", ComponentLink2URL=N.A., Footprint Doc=0201, HelpURL=N.A., LatestRevisionDate=2013-04-10, Note=N.A., Pad Count=2, Part Number=L0201-4n7, PartId=100300024, Published=2013-04-10, Supplier 1=N.A., Supplier 2=N.A., Supplier Part Number 1=N.A., Supplier Part Number 2=N.A.
L2 L4: library part L0603-10µ, "Inductor, 80mA, ±10%", Manufacturer="Taiyo Yuden", Manufacturer Part Number=LBMF1608T100K, Part number IPS=00000007794, Part number Norautron=N.A., Supplier Part Number 1=587-1714-1-ND, Artikkelnr Noca=33029314, Author=rsk, Component Class=Inductors, ComponentLink1Description=Datasheet, ComponentLink1URL=N.A., ComponentLink2Description="Supplier link", ComponentLink2URL=N.A., Footprint Doc=0603, HelpURL=http://www.yuden.co.jp/ut/product/pdf/elb2_e.pdf, LatestRevisionDate=2012-09-19, Note="LBMF1608T100K 10µH 80mA 0603", Pad Count=2, Part Number=L0603-10µ, PartId=100300078, Published=2010-02-24, Supplier 1=Digi-Key, Supplier 2=Farnell, Supplier Part Number 2=178-6105
L3: library part L0402-15n, "Inductor, 320mA, ±5%", Manufacturer="Taiyo Yuden", Manufacturer Part Number=HK100515NJ-T, Part number IPS=00000001262, Part number Norautron=N.A., Supplier Part Number 1=587-1521-1-ND, Artikkelnr Noca=33029323, Author=rsk, Component Class=Inductors, ComponentLink1Description=Datasheet, ComponentLink1URL=N.A., ComponentLink2Description="Supplier link", ComponentLink2URL=N.A., Footprint Doc=0402, HelpURL=http://www.yuden.co.jp/productdata/catalog/en/mlci04_e.pdf, LatestRevisionDate=2012-09-19, Note="High frequency chip inductor ±10%", Pad Count=2, Part Number=L0402-15n, PartId=100300056, Published=2010-07-12, Supplier 1=Digi-Key, Supplier 2=Farnell, Supplier Part Number 2=658-1328
LD1: library part "VS 25C7M5", "LED, Green, 0603, 573nm, Vf=2.0V, 24mcd, - 40 to +85°C", Manufacturer="Victory Electronics", Part number IPS="00000001274, 00000009961", Part number Norautron=N.A., Artikkelnr Noca=13019193, Author=rsk, Component Class=Optoelectronics, ComponentLink1Description=Datasheet, ComponentLink1URL=N.A., ComponentLink2Description="Supplier link", ComponentLink2URL=N.A., Footprint Doc=0603, HelpURL="\\hizz\pro\app9717\Datasheet\optoelectronics\Victory Electronics\VS 25C7M5.pdf", LatestRevisionDate=2020-10-23, Manufacturer Part Number="VS 25C7M5", Note=N.A., Pad Count=2, Part Number="VS 25C7M5", PartId=101400097, Published=2017-08-21, Supplier 1="EC Partner", Supplier 2=N.A., Supplier Part Number 1=N.A., Supplier Part Number 2=N.A.
LD2: library part APHF1608LSEEQBDZGKC, "RGB LED 1.60 mm x 0.80 mm SMD", Manufacturer="Kingbright Company LLC", Part number IPS=00000001254, Part number Norautron=N.A., Supplier Part Number 1=754-2143-1-ND, Artikkelnr Noca=N.A., Author=rsk, Component Class=Optoelectronics, ComponentLink1Description=Datasheet, ComponentLink1URL=N.A., ComponentLink2Description="Supplier link", ComponentLink2URL=N.A., Footprint Doc=LED_RGB_0603, HelpURL=http://www.kingbrightusa.com/images/catalog/SPEC/APHF1608LSEEQBDZGKC.pdf, LatestRevisionDate=2017-11-09, Manufacturer Part Number=APHF1608LSEEQBDZGKC, Note=N.A., Pad Count=4, Part Number=APHF1608LSEEQBDZGKC, PartId=101400123, Published=2017-09-18, Supplier 1=Digi-Key, Supplier 2=N.A., Supplier Part Number 2=N.A.
P1: library part "Pin Header 2x5 SMD, 1.27mm, KS, N.C.", "Pin Header 2x5, 1.27mm (50mil), SMD, Keying Shroud", Manufacturer=W-CON, Manufacturer Part Number=3132-10MS0BK00R1, Part number IPS=N.A., Artikkelnr Noca=N.A., Assembly="Not mounted", Author=rsk, Component Class=Connectors, ComponentLink1Description=Datasheet, ComponentLink1URL=N.A., ComponentLink2Description="Supplier link", ComponentLink2URL=N.A., Footprint Doc=HDR_2x5-SMD-1.27mm, HelpURL=\\hizz\pro\app9717\Datasheet\connectors\W-CON\3132-XXMXXBK00XX.pdf, LatestRevisionDate=2017-09-07, Note=N.A., Pad Count=10, Part Number="Pin Header 2x5 SMD, 1.27mm, KS, N.C.", Part number Norautron=N.A., PartId=100500262, Published=2017-09-07, Supplier 1=Cabcon, Supplier 2=Samtec, Supplier Part Number 1=3132-10MS0BK00R1, Supplier Part Number 2=FTSH-105-01-F-DV-K
R1: library part R0201-0R, "Resistor, ±5%, 0.05W", Manufacturer=N.A., Part number IPS=00000003245, Artikkelnr Noca=N.A., Author=rsk, Component Class=Resistors, ComponentLink1Description=Datasheet, ComponentLink1URL=N.A., ComponentLink2Description="Supplier link", ComponentLink2URL=N.A., Footprint Doc=0201, HelpURL=N.A., LatestRevisionDate=2017-11-09, Manufacturer Part Number=N.A., Note="Chip Res 5%", Pad Count=2, Part Number=R0201-0R, Part number Norautron=N.A., PartId=100100001, Published=2014-11-13, Supplier 1=N.A., Supplier 2=N.A., Supplier Part Number 1=N.A., Supplier Part Number 2=N.A.
R2: library part R0201-10k, "Resistor, ±1%, 0.05W", Manufacturer=N.A., Part number IPS=00000001255, Artikkelnr Noca=N.A., Author=rsk, Component Class=Resistors, ComponentLink1Description=Datasheet, ComponentLink1URL=N.A., ComponentLink2Description="Supplier link", ComponentLink2URL=N.A., Footprint Doc=0201, HelpURL=N.A., LatestRevisionDate=2014-11-13, Manufacturer Part Number=N.A., Note="Chip Res 1%", Pad Count=2, Part Number=R0201-10k, Part number Norautron=N.A., PartId=100100065, Published=2014-11-13, Supplier 1=N.A., Supplier 2=N.A., Supplier Part Number 1=N.A., Supplier Part Number 2=N.A.
R3: library part R0201-220, "Resistor, ±1%, 0.05W", Manufacturer=N.A., Part number IPS=00000000863, Artikkelnr Noca=N.A., Author=rsk, Component Class=Resistors, ComponentLink1Description=Datasheet, ComponentLink1URL=N.A., ComponentLink2Description="Supplier link", ComponentLink2URL=N.A., Footprint Doc=0201, HelpURL=N.A., LatestRevisionDate=2014-11-13, Manufacturer Part Number=N.A., Note="Chip Res 1%", Pad Count=2, Part Number=R0201-220, Part number Norautron=N.A., PartId=100100032, Published=2014-11-13, Supplier 1=N.A., Supplier 2=N.A., Supplier Part Number 1=N.A., Supplier Part Number 2=N.A.
R4: library part R0201-1k2, "Resistor, ±1%, 0.05W", Manufacturer=N.A., Part number IPS=00000001256, Artikkelnr Noca=N.A., Author=rsk, Component Class=Resistors, ComponentLink1Description=Datasheet, ComponentLink1URL=N.A., ComponentLink2Description="Supplier link", ComponentLink2URL=N.A., Footprint Doc=0201, HelpURL=N.A., LatestRevisionDate=2014-11-13, Manufacturer Part Number=N.A., Note="Chip Res 1%", Pad Count=2, Part Number=R0201-1k2, Part number Norautron=N.A., PartId=100100045, Published=2014-11-13, Supplier 1=N.A., Supplier 2=N.A., Supplier Part Number 1=N.A., Supplier Part Number 2=N.A.
R5: library part R0201-2k2, "Resistor, ±1%, 0.05W", Manufacturer=N.A., Part number IPS=00000001257, Artikkelnr Noca=N.A., Author=rsk, Component Class=Resistors, ComponentLink1Description=Datasheet, ComponentLink1URL=N.A., ComponentLink2Description="Supplier link", ComponentLink2URL=N.A., Footprint Doc=0201, HelpURL=N.A., LatestRevisionDate=2014-11-13, Manufacturer Part Number=N.A., Note="Chip Res 1%", Pad Count=2, Part Number=R0201-2k2, Part number Norautron=N.A., PartId=100100052, Published=2014-11-13, Supplier 1=N.A., Supplier 2=N.A., Supplier Part Number 1=N.A., Supplier Part Number 2=N.A.
R6: library part R0201-390, "Resistor, ±1%, 0.05W", Manufacturer=N.A., Part number IPS=00000001258, Artikkelnr Noca=N.A., Author=rsk, Component Class=Resistors, ComponentLink1Description=Datasheet, ComponentLink1URL=N.A., ComponentLink2Description="Supplier link", ComponentLink2URL=N.A., Footprint Doc=0201, HelpURL=N.A., LatestRevisionDate=2014-11-13, Manufacturer Part Number=N.A., Note="Chip Res 1%", Pad Count=2, Part Number=R0201-390, Part number Norautron=N.A., PartId=100100035, Published=2014-11-13, Supplier 1=N.A., Supplier 2=N.A., Supplier Part Number 1=N.A., Supplier Part Number 2=N.A.
R7: library part R0201-4R7, "Resistor, ±1%, 0.05W", Manufacturer=N.A., Part number IPS=00000002486, Artikkelnr Noca=N.A., Author=rsk, Component Class=Resistors, ComponentLink1Description=Datasheet, ComponentLink1URL=N.A., ComponentLink2Description="Supplier link", ComponentLink2URL=N.A., Footprint Doc=0201, HelpURL=N.A., LatestRevisionDate=2014-11-13, Manufacturer Part Number=N.A., Note="Chip Res 1%", Pad Count=2, Part Number=R0201-4R7, Part number Norautron=N.A., PartId=100100010, Published=2014-11-13, Supplier 1=N.A., Supplier 2=N.A., Supplier Part Number 1=N.A., Supplier Part Number 2=N.A.
SB1: Manufacturer=N.A., Artikkelnr Noca=N.A., Author=rsk, Component Class=Connectors, ComponentLink1Description=Datasheet, ComponentLink1URL=N.A., ComponentLink2Description="Supplier link", ComponentLink2URL=N.A., Footprint Doc=Solderbridge, HelpURL=N.A., LatestRevisionDate=2009-12-14, Manufacturer Part Number=N.A., Note=N.A., Pad Count=2, Part Number=Solderbridge, Part number IPS=N.A., Part number Norautron=N.A., PartId=100500458, Published=2009-12-14, Supplier 1=N.A., Supplier 2=N.A., Supplier Part Number 1=N.A., Supplier Part Number 2=N.A.
SB2 SB3 SB4: library part "Solderbridge Shorted", "Shorted Solderbridge", Manufacturer=N.A., Artikkelnr Noca=N.A., Author=rsk, Component Class=Connectors, ComponentLink1Description=Datasheet, ComponentLink1URL=N.A., ComponentLink2Description="Supplier link", ComponentLink2URL=N.A., Footprint Doc=Solderbridge_Shorted, HelpURL=N.A., LatestRevisionDate=2012-08-07, Manufacturer Part Number=N.A., Note=N.A., Pad Count=2, Part Number="Solderbridge Shorted", Part number IPS=N.A., Part number Norautron=N.A., PartId=100500459, Published=2012-08-07, Supplier 1=N.A., Supplier 2=N.A., Supplier Part Number 1=N.A., Supplier Part Number 2=N.A.
SW1: library part "PTS810 SJK 250 SMTR LFS", "Tactile Switch, SPNO, SMD, 260gf, 4.2x3.2x2.5mm", Manufacturer=C&K, Part number IPS=00000001259, Part number Norautron=N.A., Supplier Part Number 1=CKN10503TR-ND, Artikkelnr Noca=N.A., Author=rsk, Component Class=Switches, ComponentLink1Description=Datasheet, ComponentLink1URL=N.A., ComponentLink2Description="Supplier link", ComponentLink2URL=N.A., Footprint Doc=PTS810, HelpURL=http://www.ckswitches.com/media/1476/pts810.pdf, LatestRevisionDate=2017-11-09, Manufacturer Part Number="PTS810 SJK 250 SMTR LFS", Note=N.A., Pad Count=4, Part Number="PTS810 SJK 250 SMTR LFS", PartId=101500104, Published=2017-09-18, Supplier 1=Digi-Key, Supplier 2=N.A., Supplier Part Number 2=N.A.
SW2: "Microminiature SMT Switch, Side Actuated", Manufacturer=C&K, Part number IPS=00000001260, Part number Norautron=N.A., Supplier Part Number 1=CKN10508CT-ND, Artikkelnr Noca=50019089, Author=rsk, Component Class=Switches, ComponentLink1Description=Datasheet, ComponentLink1URL=N.A., ComponentLink2Description="Supplier link", ComponentLink2URL=N.A., Footprint Doc="PTS840 Gx", HelpURL=http://www.ck-components.com/80185/pts840_11june13.pdf/, LatestRevisionDate=2017-11-09, Manufacturer Part Number="PTS840 GK SMTR LFS", Note="Tactile Switch, SPST, SMD, 220gf", Pad Count=4, Part Number="PTS840 GK SMTR LFS", PartId=101500010, Published=2014-08-12, Supplier 1=Digi-Key, Supplier 2=Mouser, Supplier Part Number 2=611-PTS840GKSMTR
SWDCLK SWDIO: library part "Castellated Hole 0.9mm_D", "Castellated Hole 0.9mm", Manufacturer=N.A., Artikkelnr Noca=N.A., Author=rsk, Component Class=Connectors, ComponentLink1Description=Datasheet, ComponentLink1URL=N.A., ComponentLink2Description="Supplier link", ComponentLink2URL=N.A., Footprint Doc=N.A., HelpURL=N.A., LatestRevisionDate=2018-01-24, Manufacturer Part Number=N.A., Note=N.A., Pad Count=1, Part Number="Castellated Hole 0.9mm_D", Part number IPS=N.A., Part number Norautron=N.A., PartId=100500567, Published=2018-01-24, Supplier 1=N.A., Supplier 2=N.A., Supplier Part Number 1=N.A., Supplier Part Number 2=N.A.
U1: library part nRF52840-QIAAF0, "Multi-protocol Bluetooth Low Energy, IEEE 802.15.4, ANT and 2.4GHz proprietary system-on-chip", Manufacturer="Nordic Semiconductor", Part number IPS=N.A., Artikkelnr Noca=N.A., Author=hany, Component Class=nRF_Devices, ComponentLink1Description=Datasheet, ComponentLink1URL=N.A., ComponentLink2Description="Supplier link", ComponentLink2URL=N.A., Footprint Doc=AQFN-73, HelpURL=N.A., LatestRevisionDate=2021-03-24, Manufacturer Part Number=nRF52840-QIAAF0, Note=N.A., Pad Count=73, Part Number=nRF52840-QIAAF0, Part number Norautron=N.A., Published=2021-03-24, Supplier 1="Nordic Semiconductor", Supplier 2=N.A., Supplier Part Number 1=nRF52840-QIAAF0, Supplier Part Number 2=N.A.
X1: library part XTAL_SMD2016_32MHz_8pF_Murata, "XTAL SMD 2016, 32MHz, Cl=8pF, Tol: ±10ppm, Stab: ±10ppm", Manufacturer=Murata, Manufacturer Part Number=XRCGB32M000F1H01R0, Part number IPS=80000001424, Part number Norautron=N.A., Artikkelnr Noca=N.A., Author=rsk, Component Class=Oscillators, ComponentLink1Description=Datasheet, ComponentLink1URL=N.A., ComponentLink2Description="Supplier link", ComponentLink2URL=N.A., Footprint Doc=XTAL_2016, HelpURL=http://www.murata.com/en-global/products/productdetail.aspx?cate=cgsubCrystalUnits&partno=XRCGB32M000F1H01R0, LatestRevisionDate=2020-09-17, Note="XTAL SMD 32.000MHz", Pad Count=4, Part Number=XTAL_SMD2016_32MHz_8pF_Murata, PartId=101600040, Published=2016-10-26, Supplier 1=N.A., Supplier 2=N.A., Supplier Part Number 1=N.A., Supplier Part Number 2=N.A.
X2: library part XTAL_SMD2012_32.768kHz_9pF_Seiko, "XTAL SMD 2012, 32.768kHz, 9pF, ±20ppm", Manufacturer="Seiko Instruments", Manufacturer Part Number=SC20S-9.0PF20PPM, Part number IPS=80000001425, Part number Norautron=N.A., Artikkelnr Noca=N.A., Author=rsk, Component Class=Oscillators, ComponentLink1Description=Datasheet, ComponentLink1URL=N.A., ComponentLink2Description="Supplier link", ComponentLink2URL=N.A., Footprint Doc=XTAL_2012, HelpURL=http://www.sii.co.jp/en/quartz/files/2013/03/file_PRODUCT_MASTER_50811_GRAPHIC03.pdf, LatestRevisionDate=2017-11-09, Note="XTAL SMD 32.768kHz", Pad Count=2, Part Number=XTAL_SMD2012_32.768kHz_9pF_Seiko, PartId=101600015, Published=2015-10-15, Supplier 1=N.A., Supplier 2=N.A., Supplier Part Number 1=N.A., Supplier Part Number 2=N.A.

## Free pads (board coordinates)
  round 1.8 smd paste-5: 3(33.655,-5.08) 3(33.655,5.08)
  round 1.8 smd far side paste-5: 3(33.655,-5.08) 3(33.655,5.08)

## Via types
v1: diameter 0.5, hole 0.25, Top Layer to Bottom Layer, tented both sides, 105 vias

## Nets (pads, with @x,y where several pads share a name; then routed paths per layer and width w, separated by ;. In a path a pad name is that pad's centre, name@x,y a point inside that pad or via, vN(x,y) a via of type N, cw(c..) or ccw(c..) an arc to the next point about the centre after c; other vN are vias at no path point)
ANT: C26.2 R1.2 | length 30.6
  Top Layer w0.254: 3.327,5.226 0.363,5.226 0.363,3.346 3.332,3.346 3.332,1.39 0.363,1.39 0.363,-0.591 3.307,-0.591 3.307,-2.648 0.363,-2.648 0.363,-4.866 R1.2@6.09,-4.866
D_N: D1.2 DN.1 SB3.1 U1.AD4 | length 21
  Top Layer w0.2: U1.AD4 19.395,3.404 cw(c19.814,3.404) 19.518,3.7 20.419,4.6 cw(c21.105,3.914) 21.105,4.885 24.964,4.885 ccw(c24.964,5.787) 25.601,5.149 25.682,5.23 cw(c26.162,4.75) 26.162,5.428 28.839,5.428 cw(c28.839,3.861) 30.407,3.861 30.407,1.445 ccw(c32.632,1.445) 31.059,-0.129 cw(c30.163,-1.025) D1.2 ccw(c31.189,-0.784) 31.53,-0.784 cw(c32.15,-0.784) 32.15,-0.163 33,-0.163 cw(c33,-0.588) 33.3,-0.288 SB3.1
  other v1: 33.45,-0.325
D_P: D1.3 DP.1 SB4.1 U1.AD6 | length 19.9
  Top Layer w0.2: U1.AD6 cw(c19.594,3.25) 19.1,3.744 20.283,4.927 ; 20.283,4.928 cw(c20.97,4.241) 20.97,5.212 24.964,5.212 ccw(c24.964,5.787) 25.37,5.38 25.451,5.461 cw(c26.162,4.75) 26.162,5.755 28.839,5.755 cw(c28.839,3.861) 30.734,3.861 30.734,2.705 ccw(c31.843,2.705) 31.059,1.921 cw(c30.163,1.025) D1.3 31.465,0.99 cw(c31.309,0.834) 31.53,0.834 ccw(c32.2,0.834) 32.2,0.163 33,0.163 ccw(c33,0.588) 33.3,0.288 SB4.1
  other v1: 33.45,0.325
DEC1: C5.1 U1.C1 | length 2.1
  Top Layer w0.254: U1.C1 20.715,-2.25 21.658,-1.306 C5.1
DEC3: C11.1 U1.D23 | length 1.6
  Top Layer w0.145: C11.1 12.985,-2.325 13.95,-2.325
  Top Layer w0.15: 13.95,-2.325 14.064,-2.325 14.389,-2 U1.D23
DEC4_6: C15.2 C16.1 L3.1 U1.B5 U1.E24 | length 11
  Top Layer w0.145: v1(13.382,-1.871) 13.774,-1.871 U1.E24
  Top Layer w0.25: U1.B5 19.145,-2.826 20.224,-3.905 20.224,-4.797 20.291,-4.863 L3.1 L3.1
  Bottom Layer w0.145: v1(13.382,-1.871) 13.76,-2.25 18.517,-2.25 v1(19.631,-3.363)
GND: C2.2 C3.1 C4.1 C5.2 C6.2 C7.2 C8.2 C9.2 C11.2 C12.2 C13.2 C14.2 C15.1 C16.2 C17.2 C18.2 C19.2 C20.2 C21.1 C22.1 C23.1 C24.1 C25.2 C26.1 C27.1 C28.1 C29.2 D1.1 FB2.2 GND1.1 GND2.1 GND3.1 GND4.1 J2.3 P1.3 P1.5 P1.9 SW1.2 SW2.2 U1.74 U1.B7 U1.B15 U1.F23 X1.2 | length 40.1
  Top Layer w0.127: SW1.2@9.517,4.77 SW1.2@9.517,4.895
  Top Layer w0.145: C3.1 12.759,-1.395 14.29,-1.395 U1.F23
  Top Layer w0.203: 7.391,-4.331 7.772,-4.331 ccw(c7.772,-3.48) v1@8.623,-3.48 ; v1(11.836,2.21) 12.169,2.21 12.979,1.4 C9.2 ; C22.1 28.087,-1.58 v1(28.245,-1.422) ; v1(28.524,1.829) 28.524,2.286 28.829,2.591 C23.1 29.027,2.401 C24.1 ; C21.1 29.204,-2.89 v1(29.667,-3.353)
  Top Layer w0.25: U1.F23 15.645,-1.5 U1.74@16.464,-0.681 ; U1.74 18.645,-1.5 U1.B7
  Top Layer w0.254: C2.2 13.568,-4.6 13.163,-4.6 X1.2 12.954,-5.332 13.942,-5.332 14.192,-5.082 ; C8.2 15.494,4.378 v1@15.494,4.826 ; U1.B15 16.645,-0.5 U1.74 ; C7.2 18.186,4.632 v1(18.186,4.953) ; C15.1 18.836,-5.501 18.999,-5.664 21.107,-5.664 ; 19.38,-4.115 C16.2 19.557,-4.212 v1@19.557,-5.359 ; C19.2 21.336,2.87 21.539,2.667 21.92,2.667 ; C20.2 22.307,4.017 22.064,3.775 22.022,3.775 v1(22.022,3.302) 22.047,3.327 23.343,3.327 23.444,3.226 24.486,3.226 24.71,3.001 C6.2 ; 23.647,-4.699 23.647,-4.647 24.232,-4.062 v1(24.232,-4.039) ; 23.774,-1.651 23.774,-1.727 24.105,-2.057 ; 24.536,-2.819 24.536,-2.921 24.993,-3.378 C18.2 25.318,-3.677 25.603,-3.962
  Top Layer w0.305: 10.02,-2.286 cw(c10.82,-2.286) 10.921,-1.492
  Bottom Layer w0.145: v1(29.54,-0.076) 30.293,0.677 31.464,0.677 J2.3@32.131,0.01